# EAGLE board ArdBir final logo (EAGLE 7.1.0)
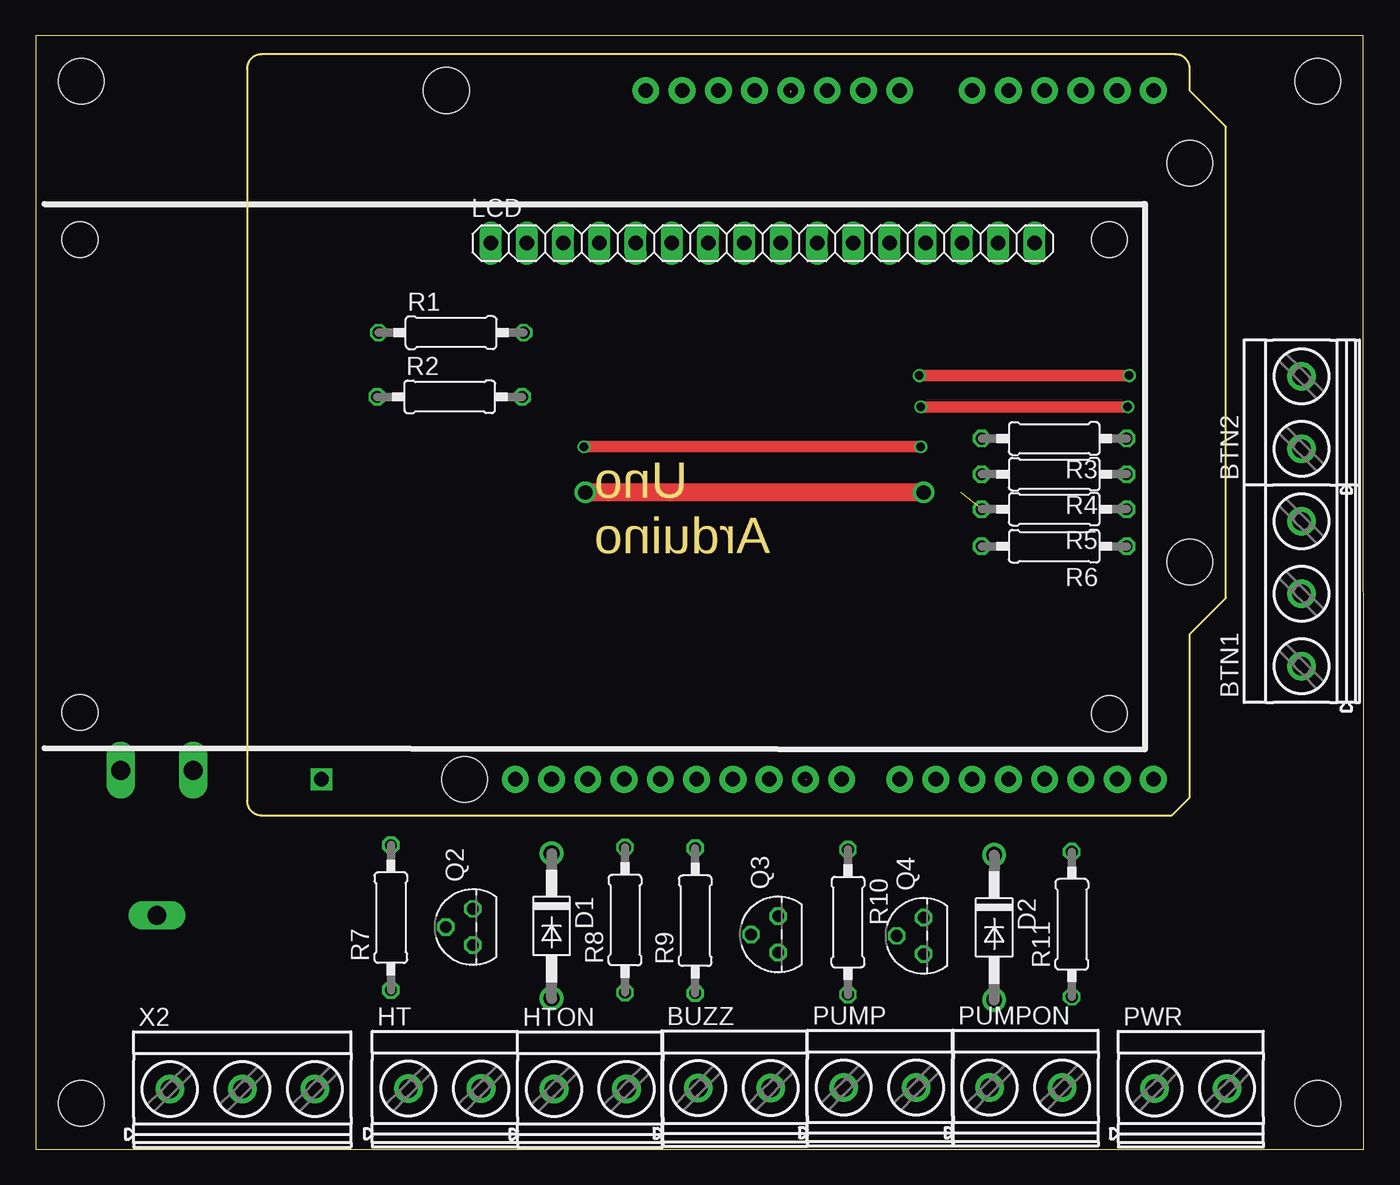
[diagram p0: board, top side]
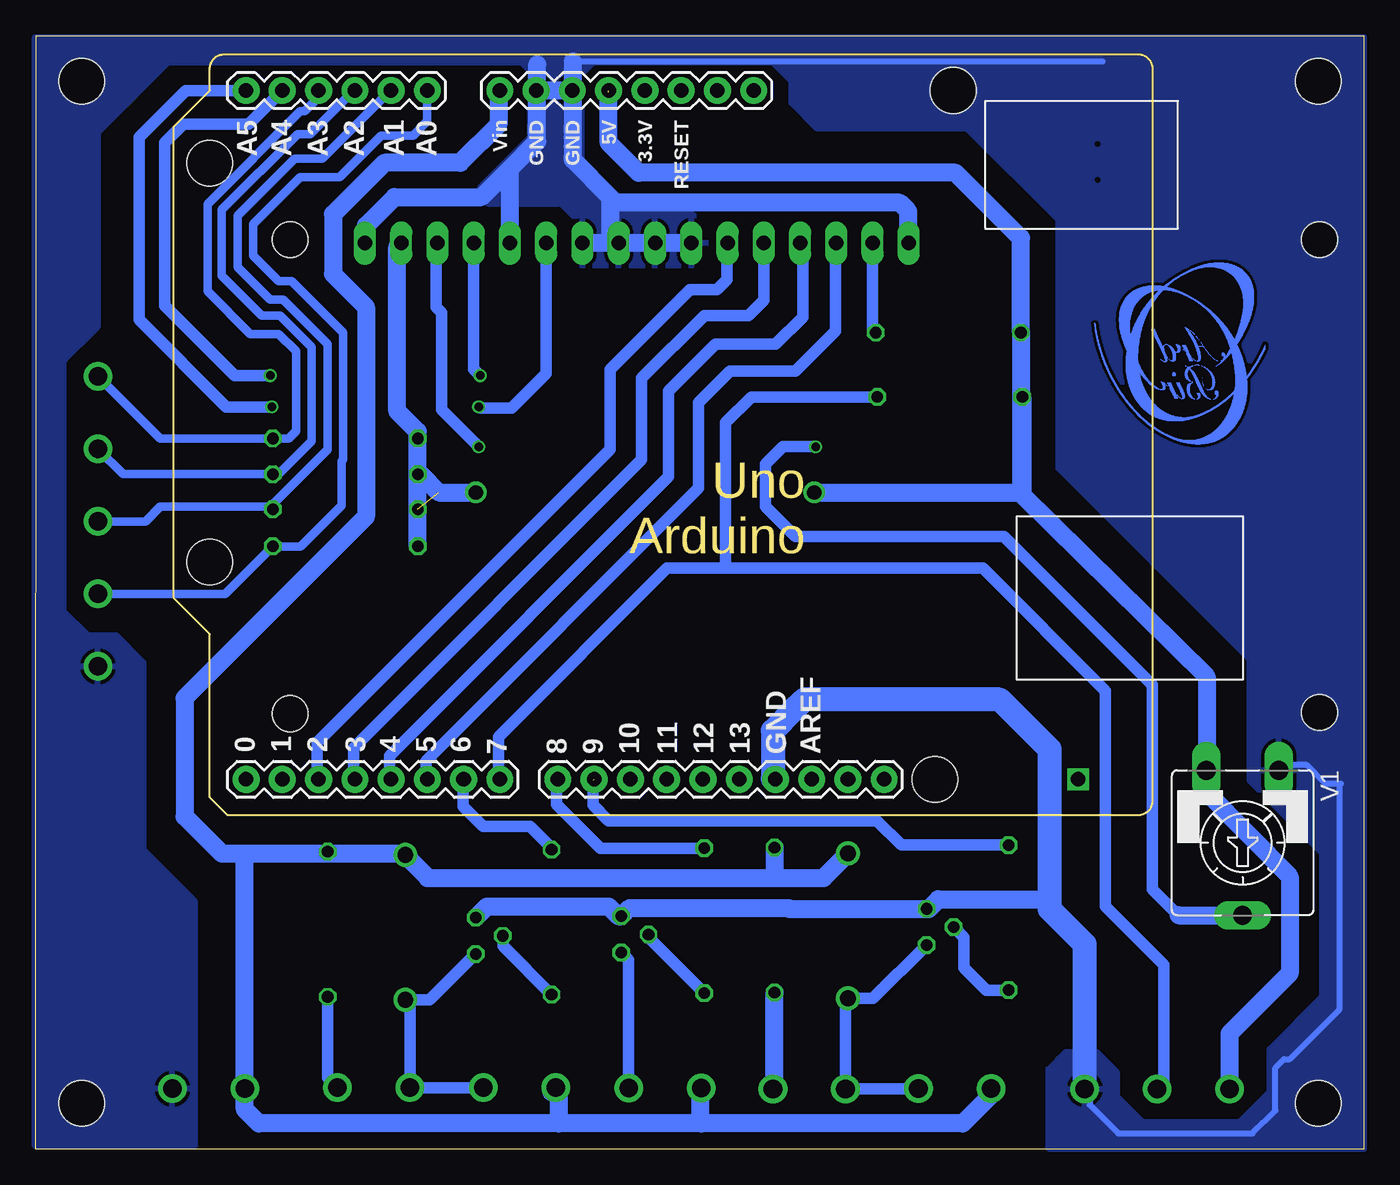
[diagram p1: board, bottom side, seen from below]

Size 93.03 x 78 mm. Coordinates in mm from the lower left corner, seen from the top.
Outline: 0,0 93.03,0 93,78 0,78 0,0
Copper layers (1*16): Top 0mil / dielectric 0mil / Bottom 0mil
Design rules "default *": minimum track width 1mil, minimum drill 1mil, track to track 0mil, track to pad 0mil, pad to pad 0mil, via to via 0mil, smd to smd 0mil, copper to edge 0mil, drill to drill 0mil, minimum pad ring 0mil, minimum via ring 0mil, stop-mask expansion 0mil, vias tented up to drill 0mil, thermal gap 10mil
Net classes: 0 default: width 0.813 mm, clearance 0.205 mm; 1 PWR: width 1.27 mm, clearance 0.205 mm to class 0, clearance 0.205 mm
Holes 3.2 mm at 3.2,3.2 89.8,3.2 3.2,74.8 89.8,74.8
Holes 2.5 mm at 75.2,30.5 3.1,30.6 3.1,63.7 75.2,63.7

## Footprints (pad centres in the part's own frame; a part is rotated, then mirrored left to right if it is on the bottom)
MKDSN1,5/3-5,08 = drill 1.3 pad 2: 1 -7.641,0.025; 2 -2.561,0.025; 3 2.519,0.025
MKDSN1,5/2-5,08 = drill 1.3 pad 2: 1 -2.561,0.025; 2 2.519,0.025
DO41-10 = drill 1.118: A 5.08,0; C -5.08,0
1X16 = drill 1.016 long: 1 -19.05,0; 2 -16.51,0; 3 -13.97,0; 4 -11.43,0; 5 -8.89,0; 6 -6.35,0; 7 -3.81,0; 8 -1.27,0; 9 1.27,0; 10 3.81,0; 11 6.35,0; 12 8.89,0; 13 11.43,0; 14 13.97,0; 15 16.51,0; 16 19.05,0
ARDUINO_UNO = drill 1.016 pad 1.88: 0 63.5,50.8; 1 60.96,50.8; 2 58.42,50.8; 3 55.88,50.8; 3.3V 35.56,2.54; 4 53.34,50.8; 5 50.8,50.8; 5V 38.1,2.54; 6 48.26,50.8; 7 45.72,50.8; 8 41.656,50.8; 9 39.116,50.8; 10 36.576,50.8; 11 34.036,50.8; 12 31.496,50.8; 13 28.956,50.8; A0 50.8,2.54; A1 53.34,2.54; A2 55.88,2.54; A3 58.42,2.54; A4 60.96,2.54; A5 63.5,2.54; AREF 23.876,50.8; GND 26.416,50.8; GND. 43.18,2.54; GND.. 40.64,2.54; I/OREF 30.48,2.54; N/C 27.94,2.54; RESET 33.02,2.54; SCL 18.796,50.8; SDA 21.336,50.8; VIN 45.72,2.54 | drill 1.016 square: 01 5.207,50.8 | drill 1.016 octagon: +5V 5.207,50.8; GND_ 5.207,50.8; MOSI 5.207,50.8; RESET. 5.207,50.8; SCK 5.207,50.8 | smd 0 x 0: <PWR>+V 3.861,8.814; <PWR>-V 3.861,6.274; <USB>+V 7.772,39.878; <USB>D+ 7.772,38.887; <USB>D- 7.772,37.871; <USB>GND 7.772,36.83 | hole 3.2: 66.04,7.62; 66.04,35.56; 15.24,50.8; 13.97,2.54
TO92 = drill 0.813 octagon: 1 1.27,0; 2 0,1.905; 3 -1.27,0
0207/10 = drill 0.813 octagon: 1 -5.08,0; 2 5.08,0
CA9V = drill 1.321 long: 1 -2.54,-5.08; 2 0,5.08; 3 2.54,-5.08

## Placement (x,y rotation side)
BTN1  MKDSN1,5/3-5,08  [MKDSN1,5/3-5,08]  88.7,41.46 90 top
BTN2  MKDSN1,5/2-5,08  [MKDSN1,5/2-5,08]  88.7,51.62 90 top
BUZZ  MKDSN1,5/2-5,08  [MKDSN1,5/2-5,08]  48.97,4.24 0 top
D1  1N4007  [DO41-10]  36.14,15.63 270 top
D2  1N4007  [DO41-10]  67.14,15.53 270 top
HT  MKDSN1,5/2-5,08  [MKDSN1,5/2-5,08]  28.68,4.21 0 top
HTON  MKDSN1,5/2-5,08  [MKDSN1,5/2-5,08]  38.87,4.18 0 top
LCD  LCD  [1X16]  50.92,63.47 0 top
PCB1  ARDUINO_UNO  [ARDUINO_UNO]  14.8,76.7 180 bottom
PUMP  MKDSN1,5/2-5,08  [MKDSN1,5/2-5,08]  59.17,4.28 0 top
PUMPON  MKDSN1,5/2-5,08  [MKDSN1,5/2-5,08]  69.37,4.28 0 top
PWR  MKDSN1,5/2-5,08  [MKDSN1,5/2-5,08]  80.94,4.21 0 top
Q2  BC337  [TO92]  30.63,15.56 90 top
Q3  BC337  [TO92]  52.01,15.04 90 top
Q4  BC337  [TO92]  62.21,14.94 90 top
R1  470  [0207/10]  29.1,57.2 0 top
R2  4.7k  [0207/10]  29,52.7 0 top
R3  10K  [0207/10]  71.35,49.78 180 top
R4  10K  [0207/10]  71.35,47.28 180 top
R5  10K  [0207/10]  71.35,44.83 180 top
R6  10K  [0207/10]  71.35,42.23 180 top
R7  470  [0207/10]  24.88,16.22 90 top
R8  470  [0207/10]  41.28,16.05 90 top
R9  470  [0207/10]  46.2,16 90 top
R10  470  [0207/10]  56.9,15.9 270 top
R11  470  [0207/10]  72.58,15.75 90 top
V1  10K  [CA9V]  8.49,21.46 180 bottom
X2  MKDSN1,5/3-5,08  [MKDSN1,5/3-5,08]  17.03,4.18 0 top

## Library data of the parts
BTN1 BTN2 BUZZ HT HTON PUMP PUMPON PWR X2 = con-phoenix-508; OC_NEWARK: unknown
D1 D2 = diode; OC_NEWARK: unknown
LCD = pinhead; OC_NEWARK: unknown
PCB1 = E14_Arduino_published
Q2-Q4 = transistor-npn; OC_NEWARK: unknown
R1-R11 = resistor; OC_NEWARK: unknown
V1 = pot; OC_NEWARK: unknown

## Nets
+5V [PWR]: LCD.15 PCB1.5V R1.1 R2.1 R3.2 R4.2 R5.2 R6.2 V1.3 X2.1
A0: BTN1.2 PCB1.A0 R6.1
A1: BTN1.3 PCB1.A1 R5.1
A2: BTN2.1 PCB1.A2 R4.1
A3: BTN2.2 PCB1.A3 R3.1
A4: LCD.13 PCB1.A4
A5: LCD.11 PCB1.A5
D2: LCD.6 PCB1.2
D3: LCD.5 PCB1.3
D4: LCD.4 PCB1.4
D5: LCD.3 PCB1.5
D6: PCB1.6 R10.1
D7: PCB1.7 R2.2 X2.2
D8: PCB1.8 R9.2
D9: PCB1.9 R7.2
GND: BTN1.1 LCD.1 LCD.7 LCD.8 LCD.9 LCD.10 LCD.12 LCD.16 PCB1.GND PCB1.GND. PCB1.GND.. PWR.2 Q2.1 Q3.1 Q4.1 V1.1 X2.3
N$1: PUMPON.2 R11.1
N$2: D1.A HT.2 HTON.1 Q2.3
N$3: Q2.2 R7.1
N$4: LCD.14 V1.2
N$5: HTON.2 R8.1
N$6: BUZZ.2 Q3.3
N$7: Q3.2 R9.1
N$8: LCD.2 R1.2
N$9: Q4.2 R10.2
N$11: D2.A PUMP.2 PUMPON.1 Q4.3
VIN [PWR]: BUZZ.1 D1.C D2.C HT.1 PCB1.VIN PUMP.1 PWR.1 R8.2 R11.2

## Tracks (layer width: path | path; a pad name or v marks a point on that pad's centre or on a via)
+5V  (via drill 1)  (2 unrouted)
  Top 1.27: v62.2,46 v38.5,46
  Bottom 1.27: X2.1 9.39,8.11 5.2,12.3 5.2,19.1 11.03,25.03 V1.3 11,26.87 11,33.1 24.02,45.92 | 24.02,45.92 R1.1 24.02,63.82 28.6,68.4 50.8,68.4 52.9,70.5 52.9,74.03 | R2.1 23.92,46.02 24.02,45.92 | R6.2 R4.2 | R4.2 R3.2 66.27,50.27 67.7,51.7 67.7,63.2 LCD.15 | R4.2 66.08,47.28 64.8,46 v62.2,46 | v38.5,46 24.1,46 24.02,45.92
A0
  Bottom 0.61: PCB1.A0 65.6,72 66.6,71 68.83,71 71.73,68.1 74.5,68.1 77.8,64.8 77.8,62.6 76,60.8 75.1,60.8 71.5,57.2 71.5,48.3 71.6,48.2 71.6,45.1 74.47,42.23 R6.1 79.76,38.9 BTN1.2
  Bottom 1.016: BTN1.2
A1
  Bottom 0.61: PCB1.A1 68.21,74.16 72.97,69.4 74.9,69.4 78.9,65.4 78.9,61.8 76.6,59.5 75.7,59.5 72.6,56.4 72.6,49 76.43,45.17 R5.1 76.6,45 84.3,45 85.32,43.98 BTN1.3
A2
  Bottom 0.61: PCB1.A2 70.75,74.16 73.81,71.1 74.7,71.1 80,65.8 80,61.2 77.2,58.4 75.9,58.4 73.7,56.2 73.7,49.6 76.02,47.28 R4.1 76.43,47.3 86.92,47.3 BTN2.1
A3
  Bottom 0.61: PCB1.A3 73.4,73.98 73.4,73.5 74.2,72.7 74.5,72.7 81,66.2 81,60.1 78,57.1 76,57.1 74.8,55.9 74.8,50.3 75.32,49.78 R3.1 84.32,49.78 BTN2.2
A4  (via drill 0.6)
  Top 0.813: v61.9,54.2 v76.6,54.2
  Bottom 0.813: LCD.13 62.35,54.65 v61.9,54.2 | v76.6,54.2 79.1,54.2 84,59.1 84,70.5 82.7,71.8 78.12,71.8 PCB1.A4
A5  (via drill 0.6)
  Top 0.813: v62,52 v76.5,52
  Bottom 0.813: LCD.11 57.27,54.33 59.7,51.9 61.9,51.9 v62,52 | v76.5,52 79.7,52 85.8,58.1 85.8,70.9 82.54,74.16 PCB1.A5
D2
  Bottom 0.813: LCD.6 44.6,63.44 44.6,60.9 45.3,60.2 47.2,60.2 52.8,54.6 52.8,49 73.32,28.48 73.32,26 PCB1.2
D3
  Bottom 0.813: LCD.5 42.03,59.47 43.1,58.4 46.2,58.4 50.6,54 50.6,48.3 70.78,28.12 70.78,26 PCB1.3
D4
  Bottom 0.813: LCD.4 39.3,63.28 39.3,58.3 41.2,56.4 45.4,56.4 48.7,53.1 48.7,47.1 68.24,27.56 68.24,26 PCB1.4
D5
  Bottom 0.813: LCD.3 37,63.42 37,57.3 39.8,54.5 44.4,54.5 46.6,52.3 46.6,46.3 65.7,27.2 65.7,26 PCB1.5
D6
  Bottom 0.813: R10.1 56.9,21.1 58.4,22.6 61.7,22.6 63.1,24 63.1,25.86 PCB1.6
D7
  Bottom 0.813: R2.2 42.9,52.7 44.7,50.9 44.7,40.7 | 44.7,40.7 48.8,40.7 60.62,28.88 60.62,26 PCB1.7 | 44.7,40.7 26.7,40.7 18.1,32.1 18.1,17 14,12.9 14,4.67 X2.2
D8
  Bottom 0.813: R9.2 53.48,21.08 56.56,24.16 56.56,25.9 PCB1.8
D9  (1 unrouted)
  Bottom 0.813: R7.2 32.4,21.3 34.1,23 52.9,23 54,24.1 54,25.85
GND
  Bottom 0.406: 55.4,76.2 18.3,76.2 | 25.5,31.5 25.5,31.2 22,27.7 22,17.2 21.9,17.1 | 39.4,31.3 25.8,31.3 25.7,31.4 25.3,31.4 21.9,28 21.9,17.1 | 21.9,17.1 19.5,14.7 19.5,4.3 19.2,4 19.2,3.1 17.2,1.1 7.8,1.1 6.2,2.7 6.2,5.7 5.6,6.3 5.2,6.3 1.7,9.8 1.7,25.5 1.6,25.6 2.7,25.6 4,26.9 5.7,26.9 6,26.6 V1.1 | PCB1.GND 41.22,29.48 39.9,30.8
  Bottom 1.27: Q4.1 61.42,17 52.9,17 52.21,16.31 Q3.1 51.42,16.9 40.3,16.9 40.23,16.83 Q2.1 30.47,16.83 29.8,17.5 22.1,17.5 22,17.6 | LCD.1 31.9,63.5 31.9,65.7 32.5,66.3 52.4,66.3 52.75,66.65 | 52.75,66.65 55.4,69.3 55.4,76.2 | LCD.16 69.9,63.54 69.9,64.7 67.9,66.7 61.8,66.7 59.8,68.7 | 57.9,74.4 57.9,70.6 59.8,68.7 | 57.9,74.4 57.9,76 | PCB1.GND.. PCB1.GND. 57.98,74.32 57.9,74.4 | LCD.7 LCD.8 LCD.9 | LCD.9 LCD.10 | LCD.9 arc90 52.75,64.03 52.75,66.65 | LCD.12 arc-90 LCD.12 59.8,68.7
  Bottom 1.676: X2.3 19.55,14.35 22,16.8 22,17.6 22,27.7 22,28 25.5,31.5 39.2,31.5 39.4,31.3 39.9,30.8 41.4,29.3 41.4,25.95
  pour Bottom: 22.1,0.1 22.1,5.6 20.9,6.8 18.7,6.8 17.3,5.4 17.3,3.7 15.5,1.9 8.7,1.9 6.6,4 6.6,7 2.9,10.7 2.9,20.7 8,25.8 8,34.3 21.4,47.7 21.4,65.1 27.8,71.5 38.3,71.5 40.1,73.3 40.1,74.8 41.4,76.1 54,76.1 54.8,75.3 54.8,69.2 52.1,66.5 48,66.5 46.1,64.6 46.1,62.8 47,61.9 54.8,61.9 55.1,62.2 55.1,65.1 56.2,66.2 61.3,66.2 61.9,66.8 61.9,67.4 58.4,70.9 58.4,75.5 59,76.1 83.8,76.1 88.7,71.2 88.7,57.6 91.1,55.2 91.1,37.7 89.4,36 87.4,36 85.5,34.1 85.5,21 81.9,17.4 81.9,0.2 93.1,0.2 93.1,77.9 0,77.9 0,0 22,0
N$1
  Bottom 0.813: PUMPON.2 72.58,5 R11.1
N$2
  Bottom 0.813: HT.2 36.28,4.24 HTON.1 | 36.06,4.45 HTON.1 | Q2.3 34.37,10.55 D1.A 36.31,10.38 HTON.1
N$3
  Bottom 0.813: R7.1 26.44,11.14 28,12.7 28,14.84 Q2.2
N$4  (via drill 0.6)
  Top 0.813: v38.4,49.2 v62,49.2
  Bottom 0.813: 12.98,16.38 14.8,18.2 14.8,32.5 25.2,42.9 39.8,42.9 41.9,45 41.9,48 40.7,49.2 v38.4,49.2 | LCD.14 64.89,62.91 65,62.8 65,59 64.6,58.6 64.6,51.8 v62,49.2
  Bottom 1.27: 12.98,16.38 V1.2
N$5
  Bottom 1.27: HTON.2 41.28,4.31 R8.1
N$6
  Bottom 0.813: Q3.3 51.49,13.25 BUZZ.2
N$7
  Bottom 0.813: R9.1 50.1,14.82 Q3.2
N$8
  Bottom 0.813: LCD.2 34.41,57.43 R1.2
N$9
  Bottom 0.813: R10.2 60.3,14.22 Q4.2
N$11
  Bottom 0.813: Q4.3 65.43,10.45 D2.A 66.81,10.12 PUMPON.1 PUMP.2
VIN
  Bottom 0.813: 72.45,20.7 R11.2
  Bottom 1.27: 78.5,20.7 80,20.7 82.6,23.3 82.6,31.6 69.9,44.3 69.9,59 72.2,61.3 72.2,65.5 68.6,69.1 63.3,69.1 60.62,71.78 60.62,74.06 PCB1.VIN | 78.5,20.7 72.45,20.7 67.23,20.7 D2.C 65.61,19.08 65.61,19 41.1,19 | 78.5,20.7 78.38,20.58 PWR.1 78.38,2.78 77.4,1.8 56.4,1.8 | BUZZ.1 46.5,4.17 46.5,1.9 46.4,1.8 | 56.9,4.01 PUMP.1 56.4,4.3 56.4,1.8 | 41.1,19 37.85,19 D1.C | R8.2 41.28,19.18 41.1,19 | HT.1 26.12,3.78 28.1,1.8 46.4,1.8 | 46.4,1.8 56.4,1.8
(copper drawn outside any net)
  shapes: Bottom area x2900